# Altium PCB MT7601.PcbDoc
Units mil, origin at the board's own origin, x right, y up, seen from the top; angles counter-clockwise.
Board outline 849.3 x 1487.37 mil, 2 copper layers (Top Layer, Bottom Layer); 61 components, 33 nets, 174 pads, 170 vias.
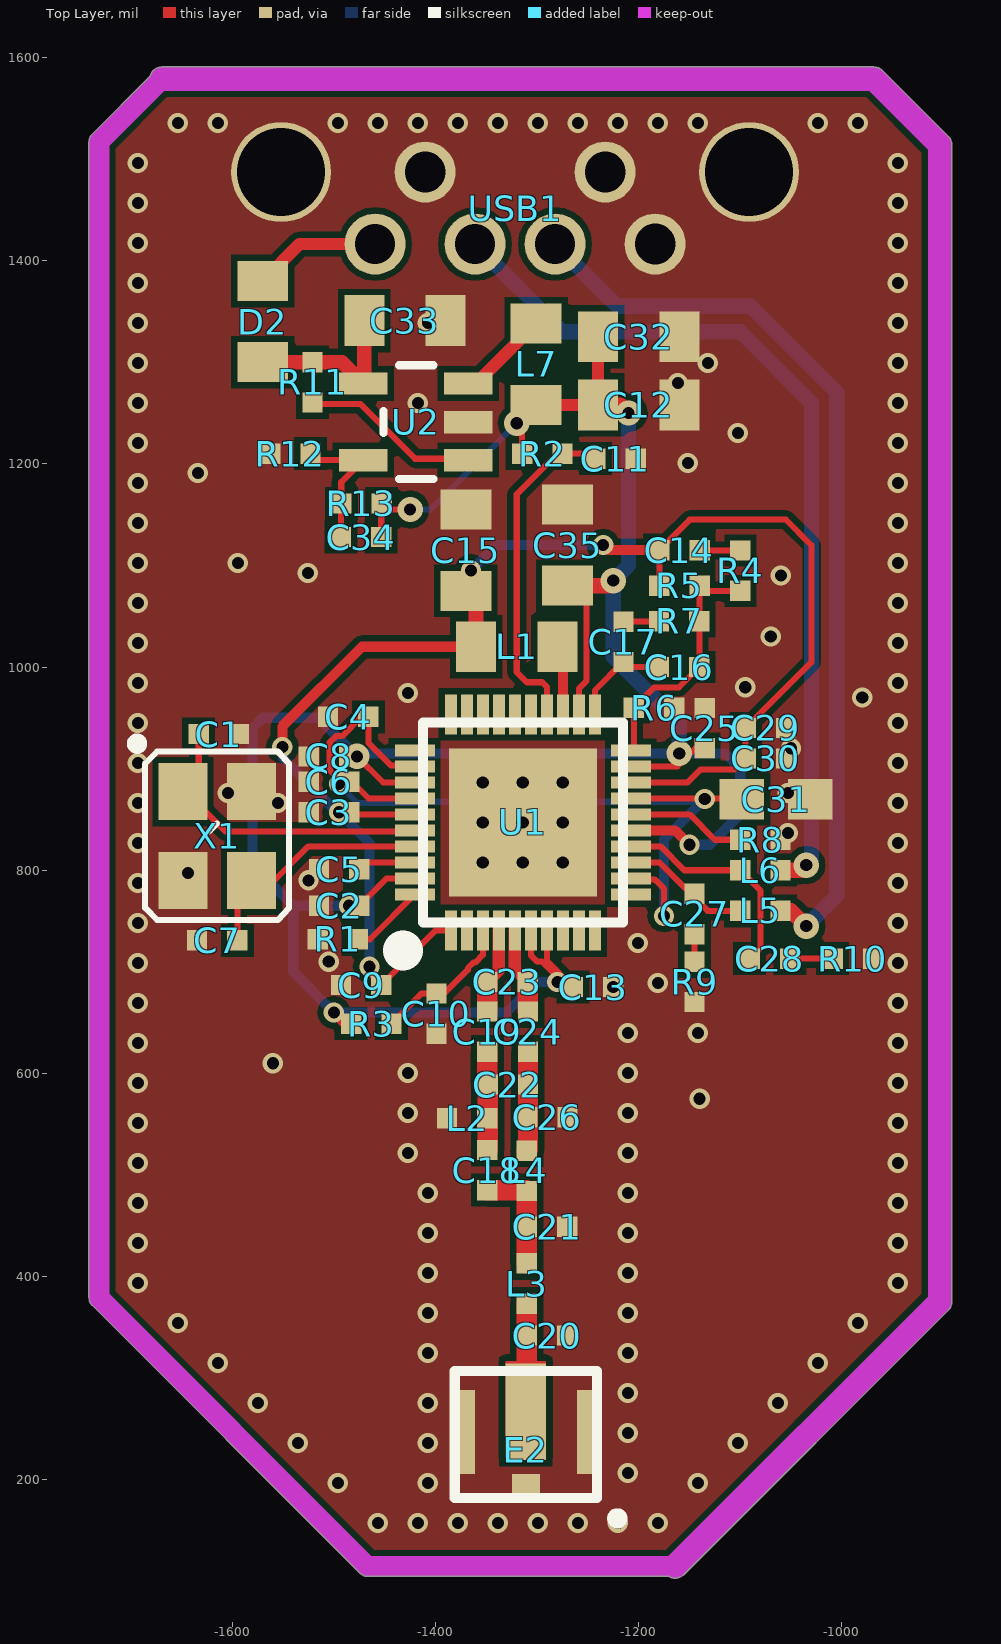
[diagram p0: Top Layer view]
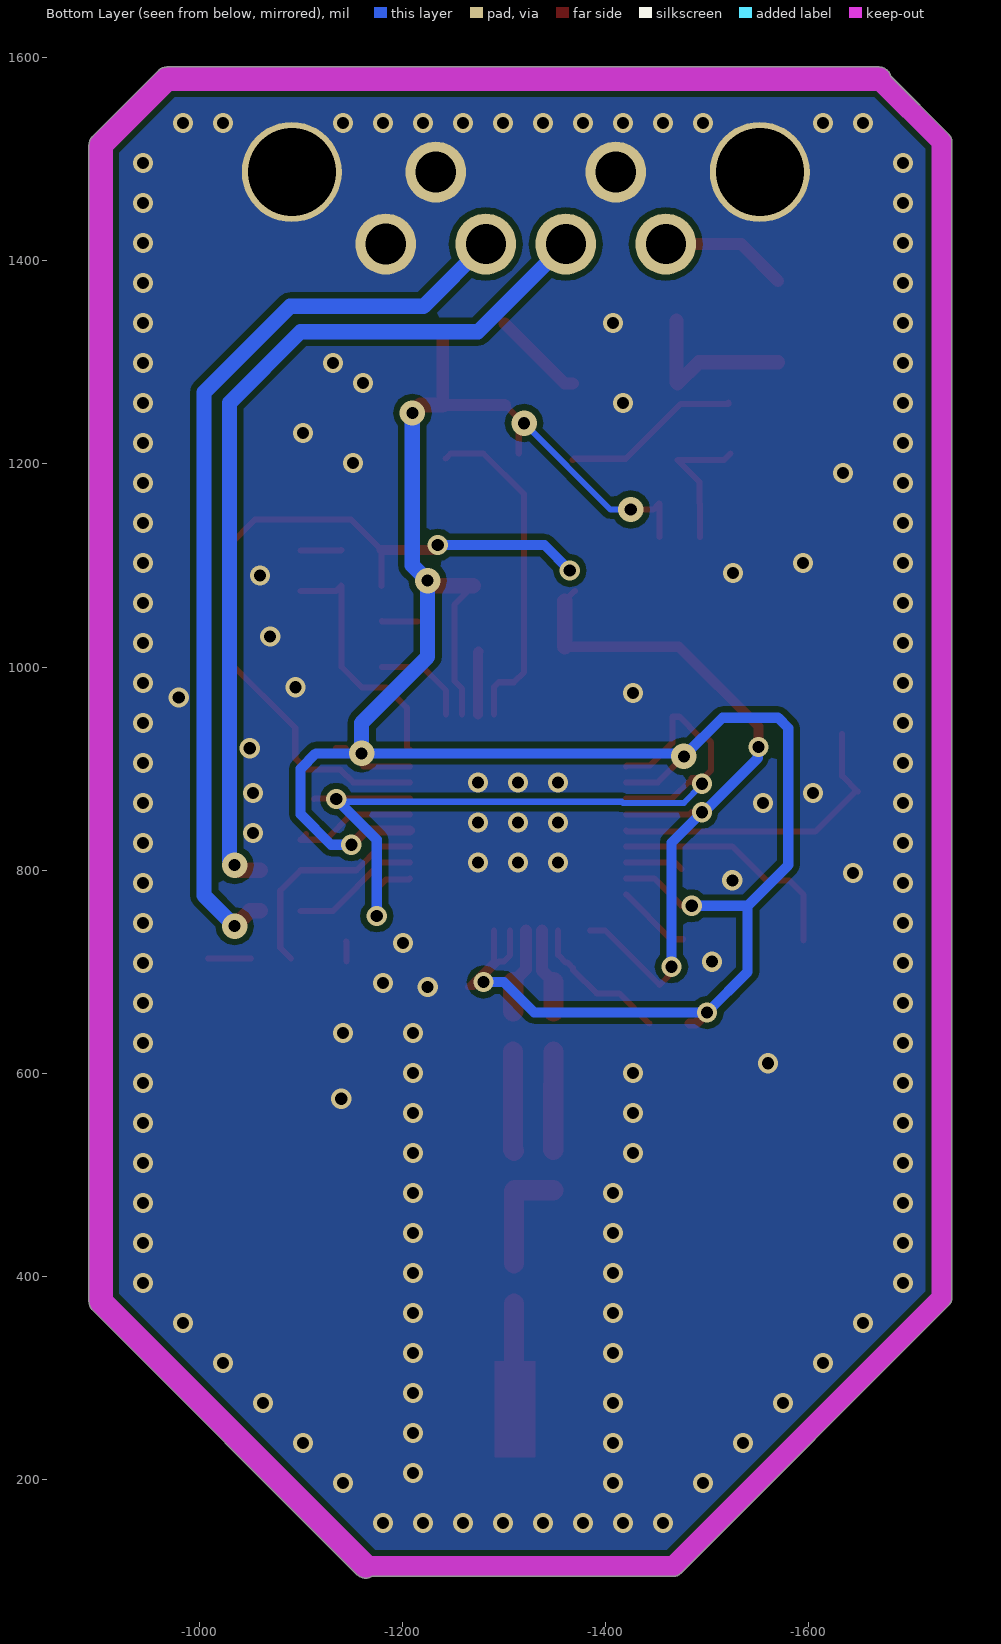
[diagram p1: Bottom Layer view, seen from below]

## Layer stack, top to bottom
Top Solder: solder mask 0.4, Solder Resist, Dk 3.5
Top Layer: signal copper 1.4
Dielectric 1: dielectric 12.6, FR-4, Dk 4.8
Bottom Layer: signal copper 1.4
Bottom Solder: solder mask 0.4, Solder Resist, Dk 3.5

## Board outline
-1741.01,379 ccw(c-1731,379) -1738.08,371.92 -1474.08,107.92 ccw(c-1467,115) -1467,104.98 -1170.29,104.98 ccw(c-1164,115) -1155.64,106.64 -895.18,367.09 -895.21,367.07 ccw(c-903.54,375.46) -891.72,375.46 -891.72,1513.78 ccw(c-903.54,1513.78) -895.21,1522.17 -895.18,1522.14 -960.14,1587.1 -960.11,1587.07 ccw(c-968.5,1578.74) -968.5,1590.57 -1669.29,1590.57 ccw(c-1669.29,1578.74) -1680.82,1581.37 -1738.08,1524.11 ccw(c-1731,1517.03) -1741.01,1517.03

## Design rules (kind name [scope] priority, off if disabled: settings)
Clearance [All] p1: gap=6
DiffPairsRouting [All] p1: maxlimit=10 minlimit=10 mostfreqgap=10 toplayer_minwidth=15 toplayer_maxwidth=15 toplayer_prefwidth=15 bottomlayer_minwidth=15 bottomlayer_maxwidth=15 bottomlayer_prefwidth=15 maxuncoupledlength=500
MinimumSolderMaskSliver [All] p1 off: minsoldermaskwidth=10
PlaneConnect [All] p1: planeconnectstyle=Direct reliefexpansion=20 reliefentries=4 reliefconductorwidth=10 reliefairgap=10
PolygonConnect [All] p1: connectstyle=Direct reliefconductorwidth=10 reliefentries=4 polygonreliefangle="90 Angle" airgapwidth=10
RoomDefinition MT7601 [InComponentClass('MT7601')] p1 off: confinementstyle=ConfineIn formatcopy=TRUE lockcomponents=FALSE outline 2018,1137 -784,1137 -784,-821 2018,-821
RoutingVias [All] p1: holewidth=11.81 width=19.68 viastyle="Through Hole" minholewidth=11.81 minwidth=19.68 maxholewidth=28 maxwidth=50
SilkToBoardRegionClearance [All] p1 off:
SilkToSilkClearance [All] p1 off: silktosilkclearance=10
SilkToSolderMaskClearance [IsPad] p1 off: minsilkscreentomaskgap=10 clearancetoexposedcopper=TRUE
SolderMaskExpansion [All] p1: expansion=4
UnpouredPolygon [All] p1: allowunpoured=FALSE
Width [All] p1: maxlimit=30 minlimit=6 preferedwidth=10
23 further rules are at their usual default settings.

## Classes and differential pairs
differential pair USB: +USB_P -USB_N

## Components (designator, comment, footprint, x,y, rotation, side; value= is the part's Value field where it differs from the comment)
C1 "27pF" 0402 -1613,934 r180 top
C2 "0.1uF" 0402 -1495,765 r0 top
C3 "0.1uF" 0402 -1505,857 r0 top
C4 "0.1uF" 0402 -1486,951 r0 top
C5 "1uF" 0402 -1495,801 r0 top
C6 "0.1uF" 0402 -1505,887 r0 top
C7 "NC" 0402 -1615,731 r0 top
C8 "0.1uF" 0402 -1505,912 r0 top
C9 "0.1uF" 0402 -1473,687 r180 top
C10 "1uF" 0402 -1399,659 r270 top
C11 "0.1uF" 0402 -1222.95,1205.09 r0 top
C12 "Cap" 0805 -1200,1258 r180 top
C13 "0.1uF" 0402 -1245,685 r0 top
C14 "3.3nF" 0402 -1160,1115 r0 top
C15 "Cap" 0805 -1370,1115 r270 top
C16 "68pF" 0402 -1160,1000 r180 top
C17 "3.9nF" 0402 -1215,1025 r270 top
C18 "1.2pF" 0402 -1349,505 r270 top
C19 "22pF" 0402 -1349,641 r90 top
C20 "NC" 0402 -1290,342 r180 top
C21 "NC" 0402 -1290,449 r180 top
C22 "1.2pF" 0402 -1329,589 r0 top
C23 "1pF" 0402 -1329,690 r180 top
C24 "22pF" 0402 -1309,641 r90 top
C25 "0.1uF" 0402 -1135,940 r270 top
C26 "1.2pF" 0402 -1290,557 r0 top
C27 "5.6pF/NC" 0402 -1144.95,757.09 r270 top
C28 "5.6pF/NC" 0402 -1071,713 r0 top
C29 "1uF" 0402 -1075,940 r0 top
C30 "0.1uF" 0402 -1075,910 r0 top
C31 "4.7uF" 0603 -1065,870 r0 top
C32 "Cap" 0805 -1200,1325 r180 top
C33 "Cap" 0805 -1430,1341 r180 top
C34 "Cap" 0402 -1473.05,1127.91 r180 top
C35 "Cap" 0805 -1270,1120 r270 top
D2 "Diode / 0R" 0805 -1570,1340 r270 top
E2 "Antenna" IPEX -1311,247 r180 top
L1 "4.7uH" 0805 -1320,1020 r180 top
L2 "2.7nH" 0402 -1369,556 r0 top
L3 "10P" 0402 -1310,393 r90 top
L4 "2.7nH" 0402 -1310,504 r90 top
L5 "18nH" 0402 -1080,760 r180 top
L6 "18nH" 0402 -1080,800 r180 top
L7 "2.2uH" 0805 -1301,1298 r270 top
R1 "24k 1%" 0402 -1496,732 r180 top
R2 "0R" 0402 -1295,1210 r0 top
R3 "0R" 0402 -1463,649 r180 top
R4 "97.6R" 0402 -1100,1095 r270 top
R5 "2k 1%" 0402 -1160,1080 r0 top
R6 "2k 1%" 0402 -1185,960 r0 top
R7 "3.4k" 0402 -1160,1045 r180 top
R8 "8.2k 1%" 0402 -1080,830 r180 top
R9 "12R/NC" 0402 -1145,690 r90 top
R10 "12R/NC" 0402 -989.05,712.91 r180 top
R11 "10k" 0402 -1521,1280 r90 top
R12 "10k" 0402 -1543,1210 r0 top
R13 "45k" 0402 -1473,1161 r0 top
U1 "MT7601U" MT7601U -1314,847 r90 top
U2 "RT8059" SOT23-5 -1419,1241 r90 top
USB1 "USB-A" USB-A-MALE -1091.3,1487.17 r90 top
X1 "40mhz" OSCILLATOR-3.2X2.5 -1615,834 r270 top

## Footprints (in the part's own frame and the unit in brackets; to place one, negate y for a bottom-side part, rotate by r counter-clockwise, add the part's x,y. Pads: shape width x height; smd on the part's side, far side on the other; paste and mask are expansions set on the pad)
0402 [mil] "0402-RES"
  rect 20x20 smd: 1(-19.69,0) 2(20,0)
0603 [mil] "0603-RES"
  rect 44x40 smd: 1(-33.46,0) 2(34,0)
0805 [mil]
  rect 39.37x50 smd: 1(-40,0) 2(40,0)
  body extent -50,-30 50,30, height 31
IPEX [mil]
  rect 40x95 smd: 1(0,-20)
  rect 19.68x82.68 smd: 2(-60,0) 2(60,0)
  rect 27.56x27.56 smd: 2(0,55)
  Top Layer region: -20,-70 20,-70 20,25 -20,25
  silkscreen extent -95,-60 70,90
MT7601U [mm]
  rect 3.7x3.7 smd: 0(0,0)
  rect 1x0.3 smd: 1(-2.7,1.8) 2(-2.7,1.4) 3(-2.7,1) 4(-2.7,0.6) 5(-2.7,0.2) 6(-2.7,-0.2) 7(-2.7,-0.6) 8(-2.7,-1) 9(-2.7,-1.4) 10(-2.7,-1.8) 21(2.7,-1.8) 22(2.7,-1.4) 23(2.7,-1) 24(2.7,-0.6) 25(2.7,-0.2) 26(2.7,0.2) 27(2.7,0.6) 28(2.7,1) 29(2.7,1.4) 30(2.7,1.8)
  rect 0.3x1 smd: 11(-1.8,-2.7) 12(-1.4,-2.7) 13(-1,-2.7) 14(-0.6,-2.7) 15(-0.2,-2.7) 16(0.2,-2.7) 17(0.6,-2.7) 18(1,-2.7) 19(1.4,-2.7) 20(1.8,-2.7) 31(1.8,2.7) 32(1.4,2.7) 33(1,2.7) 34(0.6,2.7) 35(0.2,2.7) 36(-0.2,2.7) 37(-0.6,2.7) 38(-1,2.7) 39(-1.4,2.7) 40(-1.8,2.7)
  silkscreen extent -3.2,-2.5 2.5,3
OSCILLATOR-3.2X2.5 [mil] "OSCILLATOR-3.2X2.5"
  rect 56x48 smd: 1(-43.31,-33.46) 2(44,-33.46) 3(44,34) 4(-43.31,34)
  silkscreen extent -95,-83 83,71
SOT23-5 [mil] "SOT23-5"
  rect 22x48 smd: 1(-37.4,-51.19) 2(0,-51.19) 3(38,-51.19) 4(38,52) 5(-37.4,52)
  silkscreen extent -56,-17 56,32
USB-A-MALE [mm]
  round 2.5 hole 2.2: 0(0,11.7) 0(0,0)
  round 1.524 hole 1.016: 0(0,8.1) 0(0,3.6) 4(-1.8,2.35)
  round 1.524 hole 1: 1(-1.8,9.35) 2(-1.8,6.85) 3(-1.8,4.85)
  body extent 0.2,-0.1 19,11.9, height 4

## Part data
C1 C2 C3 C4 C5 C6 C7 C8 C9 C10 C11 C13 C14 C16 C17 C18 C19 C20 C21 C22 C23 C24 C25 C26 C27 C28 C29 C30 C31: library part Cap, "Capacitor"
C12 C15 C32 C33 C34 C35: "Capacitor"
D2: library part Diode, "Default Diode"
E2: "Generic Antenna"
L1 L2 L3 L4 L5 L6 L7: library part Inductor, "Inductor"
R1 R2 R3 R4 R5 R6 R7 R8 R9 R10 R11 R12 R13: library part Res2, "Resistor"
X1: library part OSCILLATOR-3.2X2.5, "Crystal Oscillator in 3.2x2.5 SMD"

## Via types
v1: diameter 20/20 (per signal layer), hole 12, Top Layer to Bottom Layer, 150 vias
v2: diameter 20, hole 12, Top Layer to Bottom Layer, 12 vias
v3: diameter 25, hole 12, Top Layer to Bottom Layer, 8 vias

## Nets (pads, with @x,y where several pads share a name; then routed paths per layer and width w, separated by ;. In a path a pad name is that pad's centre, name@x,y a point inside that pad or via, vN(x,y) a via of type N, cw(c..) or ccw(c..) an arc to the next point about the centre after c; other vN are vias at no path point)
1.2VD: C4.2 C6.2 C31.1 U1.12 U1.17 U1.32 U1.34 | length 910.1
  Top Layer w6: U1.34 -1465.89,870.62 -1482.27,887 C6.2 -1485,890.5 -1496.23,890.5 -1504,898.27 -1504,925.73 -1497.73,932 -1491.96,932 -1472.96,951 C4.2 -1466,925.25 -1443.71,902.96 -1421.14,902.96 U1.32 ; U1.12 -1206.86,791.04 -1184.29,791.04 -1175,781.75 v2(-1175,755) ; U1.17 -1114.09,870.62 C31.1@-1113.46,870
  Bottom Layer w6: v2(-1495,885) -1495,884 -1477.14,866.14 -1417.32,866.14 -1416.09,867.37 -1137.63,867.37 v2(-1135,870)
  Bottom Layer w10: v2(-1175,755) -1175,830 v2@-1137.63,867.37
3.3VD: C2.2 C8.2 C12.2 C13.1 C25.2 C32.2 C34.1 C35.2 L7.2 R2.1 R3.2 R13.2 U1.6 U1.7 U1.15 U1.19 U1.22 U1.33 U1.39 | length 2647.4
  Top Layer w6: v2(-1485,765) C2.2 -1448.12,791.88 U1.39 ; C8.2 v3(-1477.27,912) -1451.64,886.37 U1.33 ; C34.1 -1453.36,1160.64 R13.2 -1447,1155 v3(-1425,1155) ; R2.1 -1314.68,1244.32 L7.2 ; U1.6 -1306.13,716.13 -1300,710 -1295,710 -1270,685 C13.1 -1290.38,710.69 U1.7 ; C35.2 -1251.31,1061.31 -1251.31,986.27 -1258.88,978.71 U1.22 ; U1.19 -1161.93,902.12 -1144.04,920 C25.2
  Top Layer w10: v2(-1500,660) -1489,649 R3.2 ; U1.15 -1164.13,839.13 v2(-1150,825)
  Top Layer w12: L7.2 C12.2 C32.2
  Top Layer w15: C35.2 -1230,1080 v3(-1225,1085) ; C12.2 -1218,1258 v3(-1210,1250)
  Bottom Layer w6: v3(-1425,1155) -1405,1155 v3(-1320,1240)
  Bottom Layer w10: v2(-1485,765) -1540,765 ; v3(-1477.27,912) -1515.27,950 -1570,950 -1580,940 -1580,805 -1540,765 ; v3@-1477.27,915 v3(-1160,915) -1115,915 -1100,900 -1100,855 -1130,825 v2(-1150,825) ; v2(-1280,690) -1300,690 -1330,660 v2(-1500,660) -1540,700 -1540,765
  Bottom Layer w15: v3(-1210,1250) -1210,1100 v3(-1225,1085) -1225,1010 -1160,945 v3(-1160,915)
5V: C33.2 D2.2 R11.2 U2.4 | length 170.1
  Top Layer w14: D2.2 R11.2 -1492,1300 U2.4 -1470,1280 C33.2
COMP: C16.2 C17.2 U1.21 | length 100.4
  Top Layer w6: U1.21 -1243.13,976.87 C17.2 -1210,1000 C16.2
GND: C1.1 C2.1 C3.1 C4.1 C5.1 C6.1 C7.1 C8.1 C9.2 C10.2 C11.2 C12.1 C13.2 C15.1 C20.1 C21.1 C25.1 C26.2 C29.2 C30.2 C31.2 C32.1 C33.1 C35.1 E2.2 L2.1 R1.2 R6.2 R8.1 R9.1 R10.1 R12.1 U1.0 U2.2 USB1.0 USB1.4 X1.2 X1.4
  other v1: -1456.69,157.48 -1417.32,157.48 -1377.95,157.48 -1338.58,157.48 -1299.21,157.48 -1259.84,157.48 -1220.47,157.48 -1181.1,157.48 -1496.06,196.85 -1407.48,196.85 -1141.73,196.85 -1210.63,206.69 -1535.43,236.22 -1407.48,236.22 -1102.36,236.22 -1210.63,246.06 -1574.8,275.59 -1407.48,275.59 -1062.99,275.59 -1210.63,285.43 -1614.17,314.96 -1023.62,314.96 -1407.48,324.8 -1210.63,324.8 -1653.54,354.33 -984.25,354.33 -1407.48,364.17 -1210.63,364.17 -1692.91,393.7 -944.88,393.7 -1407.48,403.54 -1210.63,403.54 -1692.91,433.07 -944.88,433.07 -1407.48,442.91 -1210.63,442.91 -1692.91,472.44 -944.88,472.44 -1407.48,482.28 -1210.63,482.28 -1692.91,511.81 -944.88,511.81 -1427.17,521.65 -1210.63,521.65 -1692.91,551.18 -944.88,551.18 -1427.17,561.02 -1210.63,561.02 -1140,575 -1692.91,590.55 -944.88,590.55 -1427.17,600.39 -1210.63,600.39 -1560,610 -1692.91,629.92 -944.88,629.92 -1210.63,639.76 -1141.73,639.76 -1692.91,669.29 -944.88,669.29 -1225,685 -1181.1,688.98 -1692.91,708.66 -944.88,708.66 -1505,710 -1200.79,728.35 -1692.91,748.03 -944.88,748.03 -1692.91,787.4 -944.88,787.4 -1525,790 -1643.7,797.24 -1353.37,807.63 -1314,807.63 -1274.63,807.63 -1692.91,826.77 -944.88,826.77 -1053.15,836.61 -1353.37,847 -1314,847 -1274.63,847 -1692.91,866.14 -1555.12,866.14 -944.88,866.14 -1604.33,875.98 -1053.15,875.98 -1353.37,886.37 -1314,886.37 -1274.63,886.37 -1692.91,905.51 -944.88,905.51 -1050,920 -1692.91,944.88 -944.88,944.88 -980,970 -1427.17,974.41 -1095,980 -1692.91,984.25 -944.88,984.25 -1692.91,1023.62 -944.88,1023.62 -1070,1030 -1692.91,1062.99 -944.88,1062.99 -1060,1090 -1525.59,1092.52 -1692.91,1102.36 -1594.49,1102.36 -944.88,1102.36 -1692.91,1141.73 -944.88,1141.73 -1692.91,1181.1 -944.88,1181.1 -1633.86,1190.94 -1151.57,1200.79 -1692.91,1220.47 -944.88,1220.47 -1102.36,1230.32 -1692.91,1259.84 -1417.32,1259.84 -944.88,1259.84 -1161.42,1279.53 -1692.91,1299.21 -1131.89,1299.21 -944.88,1299.21 -1692.91,1338.58 -1407.48,1338.58 -944.88,1338.58 -1692.91,1377.95 -944.88,1377.95 -1692.91,1417.32 -944.88,1417.32 -1692.91,1456.69 -944.88,1456.69 -1692.91,1496.06 -944.88,1496.06 -1653.54,1535.43 -1614.17,1535.43 -1496.06,1535.43 -1456.69,1535.43 -1417.32,1535.43 -1377.95,1535.43 -1338.58,1535.43 -1299.21,1535.43 -1259.84,1535.43 -1220.47,1535.43 -1181.1,1535.43 -1141.73,1535.43 -1023.62,1535.43 -984.25,1535.43
NetC10_1: C10.1 R3.1 U1.3 | length 143
  Top Layer w6: R3.1 -1413.63,678.68 C10.1 -1391.31,678.68 -1368,702 -1368,703.73 -1362.73,709 -1361,709 -1353.37,716.63 U1.3
NetC14_2: C14.2 R4.1 | length 40.1
  Top Layer w6: C14.2 -1139.68,1114.68 R4.1
NetC16_1: C16.1 R4.2 R5.2 R6.1 R7.1 U1.20 | length 246.5
  Top Layer w6: U1.20 -1204.68,920.88 R6.1 -1184.68,980 -1160.31,980 C16.1 R7.1 -1140.31,1079.68 R5.2 -1135,1075 R4.2
NetC18_1: C18.1 C19.1 C22.1 L2.2 | length 96.9
  Top Layer w20: C18.1 -1348.68,525 C22.1 -1349,589.32 C19.1
NetC18_2: C18.2 C21.2 L3.2 L4.1 | length 110.6
  Top Layer w20: C18.2 -1310.68,485 L4.1 C21.2 L3.2
NetC22_2: C22.2 C24.1 C26.1 L4.2 | length 97.7
  Top Layer w20: L4.2 -1309,525 C22.2 C24.1
NetC27_1: C27.1 L5.2 U1.13 | length 127.4
  Top Layer w6: U1.13 -1179.6,807.63 -1131.97,760 L5.2
NetC27_2: C27.2 R9.2 | length 20
  Top Layer w6: R9.2 -1145,729.95 C27.2@-1144.95,730
NetC28_1: C28.1 L6.2 U1.14 | length 217.1
  Top Layer w6: U1.14 -1178.38,823.38 -1155,800 L6.2 -1080,780 -1080,723.68 C28.1
NetC28_2: C28.2 R10.2 | length 42
  Top Layer w6: C28.2 -1009.13,713 R10.2
NetC34_2: C34.2 R12.2 R13.1 U2.5 | length 139.5
  Top Layer w6: R12.2 -1516.6,1203.6 U2.5 -1492.68,1181.91 R13.1 -1493.05,1160.64 C34.2
NetD2_1: D2.1 USB1.1 | length 125.6
  Top Layer w12: D2.1 -1533.7,1416.3 USB1.1
NetL7_1: L7.1 U2.3 | length 91.3
  Top Layer w12: U2.3 -1360,1279 L7.1
NetR1_1: R1.1 U1.40 | length 74.3
  Top Layer w6: R1.1 -1464.43,732 U1.40
NetR11_1: R11.1 U2.1 | length 177.4
  Top Layer w6: R11.1 -1521,1259 -1474,1259 -1420,1205 -1369.22,1205 U2.1
PHASE: L1.1 U1.23 | length 61.9
  Top Layer w10: L1.1@-1275,1015 -1274.63,1014.63 U1.23
PMU_COMP: C17.1 R7.2 | length 35.1
  Top Layer w6: C17.1 -1180.31,1044.68 R7.2
PMU_OUT: C3.2 C9.1 C14.1 C15.2 C29.1 C30.1 L1.2 R5.1 U1.1 U1.18 U1.35 | length 1525.4
  Top Layer w6: v2(-1495,857) C3.2@-1495,855 ; v2(-1465,705) -1466.31,703.69 -1466.31,700 C9.1 -1399.61,740.7 U1.1 ; U1.35 C3.2@-1482.87,854.87 ; C15.2 C15.2@-1360,1065 ; v2(-1235,1120) v2@-1230,1115 ; U1.18 -1151.82,886.37 -1139.19,899 -1105.68,899 C30.1 C29.1 -1030,1004.68 -1030,1120 -1055,1145 -1149.68,1145 C14.1 R5.1 ; C3.2@-1495,855 -1494.87,854.87 C3.2@-1482.87,854.87 ; C3.2@-1495,855 -1487,855 C3.2 C3.2@-1482.87,854.87
  Top Layer w10: v2(-1550.68,921.31) -1550.68,941.56 -1472.24,1020 L1.2 ; v2@-1230,1115 C14.1
  Top Layer w15: L1.2 C15.2@-1360,1065
  Bottom Layer w10: v2(-1550.68,921.31) -1550,920.62 -1550,910.3 -1496.7,857 v2(-1495,857) -1465,827 v2(-1465,705) ; v2(-1365,1095) -1340,1120 v2(-1235,1120)
RF0_PA_OUTN: C23.1 C24.2 U1.5 | length 85
  Top Layer w12: U1.5 -1321.87,702.56 C23.1
  Top Layer w20: C23.1 -1309.31,661.32 C24.2
RF0_PA_OUTP: C19.2 C23.2 U1.4 | length 84.4
  Top Layer w12: C23.2 -1337.62,701.38 U1.4
  Top Layer w20: C19.2 C23.2
RFOUT_G0: C20.2 E2.1 L3.1 | length 106.7
  Top Layer w20: E2.1 -1310,268 C20.2 L3.1
RST_N: C11.1 R2.2 U1.24 | length 333.7
  Top Layer w6: U1.24 -1290.38,980.38 -1295,985 -1310,985 -1320,995 -1320,1170 -1280,1210 R2.2 -1247.55,1210 C11.1
USB_N: L6.1 USB1.2 | length 880.2
  Top Layer w15: L6.1 -1040,800 v3(-1035,805)
  Bottom Layer w15: USB1.2 -1274.69,1330 -1100,1330 -1030,1260 -1030,810 v3(-1035,805)
USB_P: L5.1 USB1.3 | length 907
  Top Layer w15: L5.1 -1050,760 v3(-1035,745)
  Bottom Layer w15: USB1.3 -1220.94,1355 -1089.64,1355 -1005,1270.36 -1005,775 v3(-1035,745)
VRES: R8.2 U1.16 | length 125.6
  Top Layer w6: U1.16 -1149.87,854.87 -1125,830 R8.2 R8.2@-1105.38,835.38
XI: C7.2 U1.37 X1.3 | length 239.3
  Top Layer w6: C7.2 -1595,776 X1.3 -1558.41,790 -1525.03,823.38 U1.37
XO: C1.2 U1.36 X1.1 | length 308
  Top Layer w6: C1.2 -1633,892.77 X1.1 -1645.73,877.31 -1606.42,838 -1421.43,838 U1.36
XTAL_V12A: C5.2 U1.38 | length 57.4
  Top Layer w6: C5.2 -1468.37,807.63 U1.38
pads on no net: U1.2 U1.8 U1.9 U1.10 U1.11 U1.25 U1.26 U1.27 U1.28 U1.29 U1.30 U1.31

## Polygon pours and split planes (outlines as drawn)
GND on Top Layer "Top Layer-No Net" (solid, remove dead copper, pour order 4): -1870,85 -1865,90 -1865,1645 -700,1645 -600,1545 -780,1365 -780,20
GND on Bottom Layer "Top Layer-No Net" (solid, remove dead copper, pour order 6): -1825,1610 -790,1610 -775,1595 -830,1540 -830,130 -830,125 -910,45 -915,40 -1765,40

## Keep-outs
Keep-Out Layer:
  lines w20: -1669.29,1578.74 -1731,1517.03 -1731,379 -1467,115 -1164,115
  lines w23.62: -1669.29,1578.74 -968.5,1578.74 -903.54,1513.78 -903.54,375.46 -1164,115